# EAGLE board humidity-v2.4 panel (EAGLE 6.4)
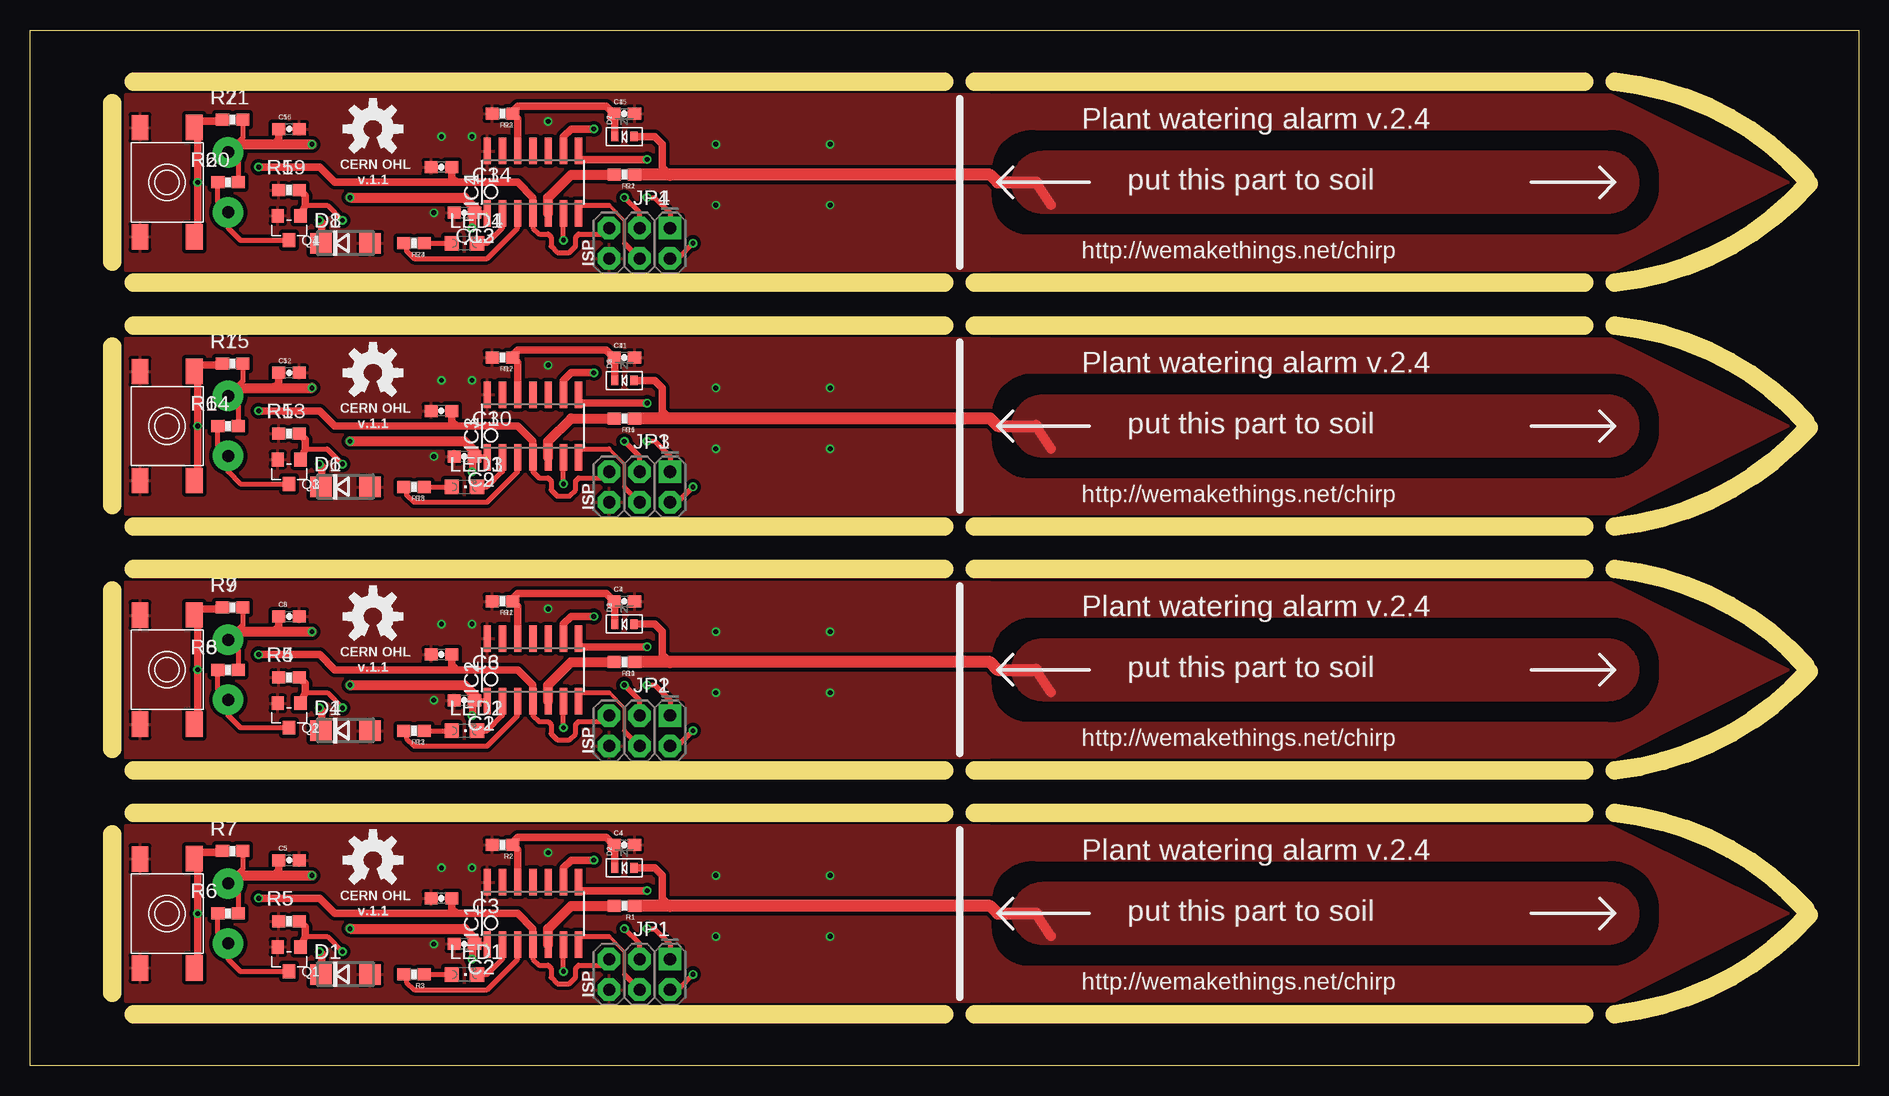
[diagram p0: board, top side]
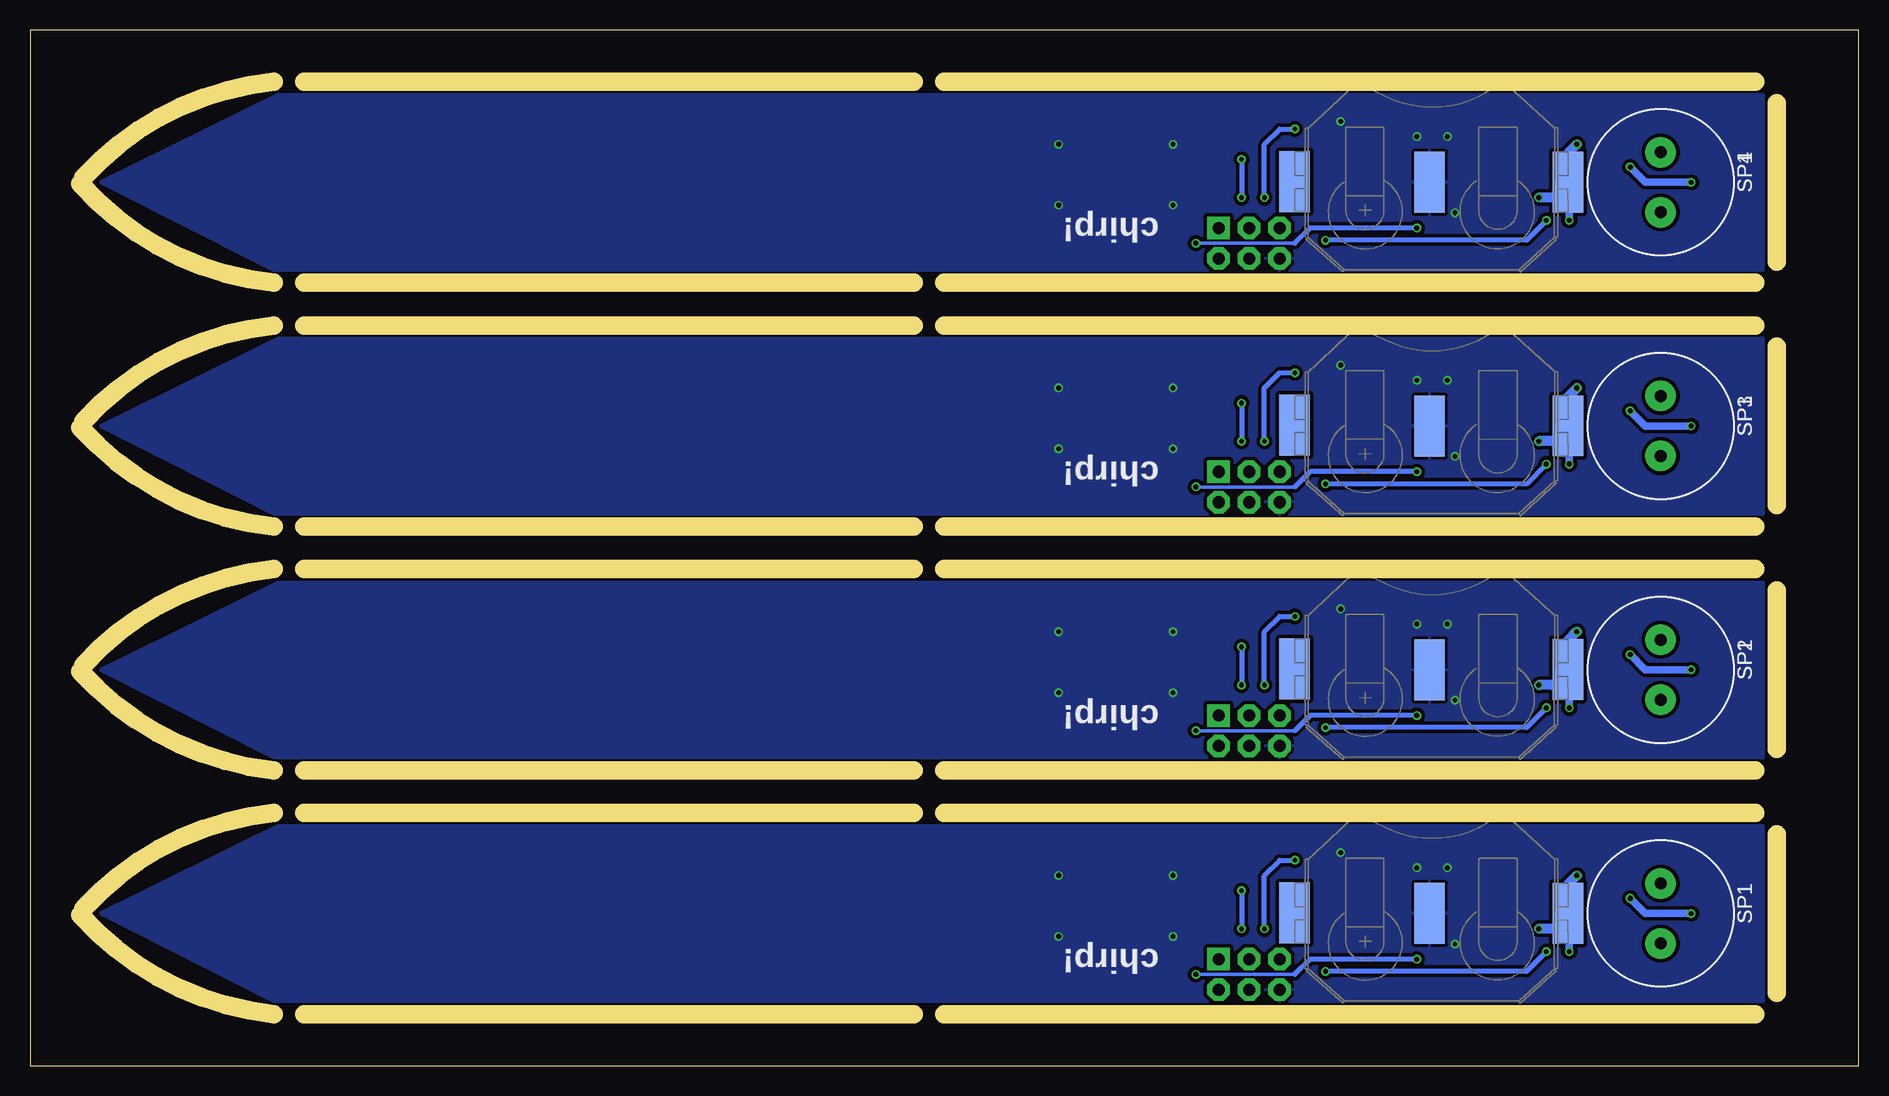
[diagram p1: board, bottom side, seen from below]

Size 152.4 x 86.36 mm. Coordinates in mm from the lower left corner, seen from the top.
Outline: 0,0 0,86.36 152.4,86.36 152.4,0 0,0
Copper layers (1*16): Top 0.035mm / dielectric 1.5mm / Bottom 0.035mm
Design rules "Fusion_eagle_rule_v1.1": minimum track width 6mil, minimum drill 12mil, track to track 6mil, track to pad 6mil, pad to pad 6mil, via to via 6mil, smd to smd 0mil, copper to edge 10mil, drill to drill 10mil, minimum pad ring 10mil, minimum via ring 6mil, stop-mask expansion 2mil, vias tented up to drill 100mil, thermal gap 10mil
Milling: 32 lines

## Footprints (pad centres in the part's own frame; a part is rotated, then mirrored left to right if it is on the bottom)
BAT-HLD-001 = smd 2.54 x 5.08: 1 -11.51,-0.02; 2 0,0; 3 11.25,-0.07
0603-CAP = smd 1.1 x 1: 1 -0.85,0; 2 0.85,0
DO214AC = smd 1.8 x 1.7: A 2.05,0; C -2.05,0
SOD-523 = smd 0.8 x 0.6: A 0,-0.8; K 0,0.8
SOIC14 = smd 0.61 x 2.21: 1 -3.81,-2.603; 2 -2.54,-2.603; 3 -1.27,-2.603; 4 0,-2.603; 5 1.27,-2.603; 6 2.54,-2.603; 7 3.81,-2.603; 8 3.81,2.603; 9 2.54,2.603; 10 1.27,2.603; 11 0,2.603; 12 -1.27,2.603; 13 -2.54,2.603; 14 -3.81,2.603
2X3-NS = drill 1.016 pad 1.88 square: 1 -2.54,-1.27 | drill 1.016 pad 1.88 octagon: 2 -2.54,1.27; 3 0,-1.27; 4 0,1.27; 5 2.54,-1.27; 6 2.54,1.27
CHIPLED_0805 = smd 1.2 x 1.2: A 0,-1.05; C 0,1.05
SOT23 = smd 1.016 x 1.143: 1 -0.95,-1.016; 2 0.95,-1.016; 3 0,1.016
0603-RES = smd 1.1 x 1: 1 -0.85,0; 2 0.85,0
PS12 = drill 1 pad 2.54: P$1 -2.5,0; P$2 2.5,0
FSMJSMA = smd 2.108 x 1.397: A -4.547,-2.261; A' 4.568,-2.261; B -4.547,2.261; B' 4.547,2.261

## Placement (x,y rotation side)
B1  [BAT-HLD-001]  35.76,12.7 180 bottom
B2  [BAT-HLD-001]  35.76,33.02 180 bottom
B3  [BAT-HLD-001]  35.76,53.34 180 bottom
B4  [BAT-HLD-001]  35.76,73.66 180 bottom
C1  100nF  [0603-CAP]  36.2,30.48 180 top
C2  100nF  [0603-CAP]  36.2,10.16 180 top
C3  100nF  [0603-CAP]  34.29,13.97 180 top
C4  1uF  [0603-CAP]  49.53,18.41 0 top
C5  1uF  [0603-CAP]  21.59,17.14 0 top
C6  100nF  [0603-CAP]  34.29,34.29 180 top
C7  1uF  [0603-CAP]  49.53,38.73 0 top
C8  1uF  [0603-CAP]  21.59,37.47 0 top
C9  100nF  [0603-CAP]  36.2,50.8 180 top
C10  100nF  [0603-CAP]  34.29,54.61 180 top
C11  1uF  [0603-CAP]  49.53,59.05 0 top
C12  1uF  [0603-CAP]  21.59,57.79 0 top
C13  100nF  [0603-CAP]  36.2,71.12 180 top
C14  100nF  [0603-CAP]  34.29,74.93 180 top
C15  1uF  [0603-CAP]  49.53,79.38 0 top
C16  1uF  [0603-CAP]  21.59,78.11 0 top
D1  [DO214AC]  26.29,7.62 0 top
D2  DIODE-SCHOTTKY_  [SOD-523]  49.53,16.51 90 top
D3  DIODE-SCHOTTKY_  [SOD-523]  49.53,36.83 90 top
D4  [DO214AC]  26.29,27.94 0 top
D5  DIODE-SCHOTTKY_  [SOD-523]  49.53,57.15 90 top
D6  [DO214AC]  26.29,48.26 0 top
D7  DIODE-SCHOTTKY_  [SOD-523]  49.53,77.47 90 top
D8  [DO214AC]  26.29,68.58 0 top
IC1  TINY24/44/84-SSU  [SOIC14]  41.91,12.7 0 top
IC2  TINY24/44/84-SSU  [SOIC14]  41.91,33.02 0 top
IC3  TINY24/44/84-SSU  [SOIC14]  41.91,53.34 0 top
IC4  TINY24/44/84-SSU  [SOIC14]  41.91,73.66 0 top
JP1  AVR_SPI_PRG_6NS  [2X3-NS]  50.8,7.62 180 top
JP2  AVR_SPI_PRG_6NS  [2X3-NS]  50.8,27.94 180 top
JP3  AVR_SPI_PRG_6NS  [2X3-NS]  50.8,48.26 180 top
JP4  AVR_SPI_PRG_6NS  [2X3-NS]  50.8,68.58 180 top
LED1  [CHIPLED_0805]  36.2,7.62 270 top
LED2  [CHIPLED_0805]  36.2,27.94 270 top
LED3  [CHIPLED_0805]  36.2,48.26 270 top
LED4  [CHIPLED_0805]  36.2,68.58 270 top
Q1  [SOT23]  21.59,8.89 180 top
Q2  [SOT23]  21.59,29.21 180 top
Q3  [SOT23]  21.59,49.53 180 top
Q4  [SOT23]  21.59,69.85 180 top
R1  10K  [0603-RES]  49.53,13.34 180 top
R2  510K  [0603-RES]  39.37,18.41 180 top
R3  100R  [0603-RES]  32,7.62 180 top
R4  10K  [0603-RES]  21.59,32.38 0 top
R5  10K  [0603-RES]  21.59,12.07 0 top
R6  1K  [0603-RES]  16.51,12.7 0 top
R7  10K  [0603-RES]  16.89,17.91 0 top
R8  1K  [0603-RES]  16.51,33.02 0 top
R9  10K  [0603-RES]  16.89,38.23 0 top
R10  10K  [0603-RES]  49.53,33.66 180 top
R11  510K  [0603-RES]  39.37,38.73 180 top
R12  100R  [0603-RES]  32,27.94 180 top
R13  10K  [0603-RES]  21.59,52.71 0 top
R14  1K  [0603-RES]  16.51,53.34 0 top
R15  10K  [0603-RES]  16.89,58.55 0 top
R16  10K  [0603-RES]  49.53,53.98 180 top
R17  510K  [0603-RES]  39.37,59.05 180 top
R18  100R  [0603-RES]  32,48.26 180 top
R19  10K  [0603-RES]  21.59,73.03 0 top
R20  1K  [0603-RES]  16.51,73.66 0 top
R21  10K  [0603-RES]  16.89,78.87 0 top
R22  10K  [0603-RES]  49.53,74.3 180 top
R23  510K  [0603-RES]  39.37,79.38 180 top
R24  100R  [0603-RES]  32,68.58 180 top
SP1  SPEAKER/PS12  [PS12]  16.51,12.7 270 bottom
SP2  SPEAKER/PS12  [PS12]  16.51,33.02 270 bottom
SP3  SPEAKER/PS12  [PS12]  16.51,53.34 270 bottom
SP4  SPEAKER/PS12  [PS12]  16.51,73.66 270 bottom
SW1  SPST_TACTFSMJSMA  [FSMJSMA]  11.43,12.7 90 top
SW2  SPST_TACTFSMJSMA  [FSMJSMA]  11.43,33.02 90 top
SW3  SPST_TACTFSMJSMA  [FSMJSMA]  11.43,53.34 90 top
SW4  SPST_TACTFSMJSMA  [FSMJSMA]  11.43,73.66 90 top

## Library data of the parts
B1-B4 C1-C16 JP1-JP4 R1-R24 = SparkFun
D1 D4 D6 D8 = diode
D2 D3 D5 D7 = microbuilder
IC1-IC4 = avr-5
LED1-LED4 SP1-SP4 SW1-SW4 = adafruit
Q1-Q4 = Seeed-Discrete

## Nets
BUZZER: IC1.6 Q1.1 R5.2
BUZZER1: IC2.6 Q2.1 R4.2
BUZZER2: IC3.6 Q3.1 R13.2
BUZZER3: IC4.6 Q4.1 R19.2
CAPACITANCE_V: C4.1 D2.K IC1.12 R2.1
CAPACITANCE_V1: C7.1 D3.K IC2.12 R11.1
CAPACITANCE_V2: C11.1 D5.K IC3.12 R17.1
CAPACITANCE_V3: C15.1 D7.K IC4.12 R23.1
CLK_OUT: IC1.5 R1.2
CLK_OUT1: IC2.5 R10.2
CLK_OUT2: IC3.5 R16.2
CLK_OUT3: IC4.5 R22.2
GND: B1.2 C2.2 C3.2 C4.2 C5.2 D1.A IC1.14 JP1.6 Q1.2 R2.2 R5.1 SW1.B SW1.B'
GND1: B2.2 C1.2 C6.2 C7.2 C8.2 D4.A IC2.14 JP2.6 Q2.2 R4.1 R11.2 SW2.B SW2.B'
GND2: B3.2 C9.2 C10.2 C11.2 C12.2 D6.A IC3.14 JP3.6 Q3.2 R13.1 R17.2 SW3.B SW3.B'
GND3: B4.2 C13.2 C14.2 C15.2 C16.2 D8.A IC4.14 JP4.6 Q4.2 R19.1 R23.2 SW4.B SW4.B'
LED_A: IC1.3 R3.2
LED_A1: IC2.3 R12.2
LED_A2: IC3.3 R18.2
LED_A3: IC4.3 R24.2
LED_K: IC1.2 LED1.C
LED_K1: IC2.2 LED2.C
LED_K2: IC3.2 LED3.C
LED_K3: IC4.2 LED4.C
MISO: IC1.8 JP1.1
MISO1: IC2.8 JP2.1
MISO2: IC3.8 JP3.1
MISO3: IC4.8 JP4.1
MOSI: IC1.7 JP1.4
MOSI1: IC2.7 JP2.4
MOSI2: IC3.7 JP3.4
MOSI3: IC4.7 JP4.4
N$1: Q1.3 R6.1 SP1.P$2
N$2: LED1.A R3.1
N$4: Q2.3 R8.1 SP2.P$2
N$5: LED2.A R12.1
N$6: Q3.3 R14.1 SP3.P$2
N$7: LED3.A R18.1
N$8: Q4.3 R20.1 SP4.P$2
N$9: LED4.A R24.1
RESET: C3.1 IC1.4 JP1.5 R7.1 SW1.A SW1.A'
RESET1: C6.1 IC2.4 JP2.5 R9.1 SW2.A SW2.A'
RESET2: C10.1 IC3.4 JP3.5 R15.1 SW3.A SW3.A'
RESET3: C14.1 IC4.4 JP4.5 R21.1 SW4.A SW4.A'
SCK: IC1.9 JP1.3
SCK1: IC2.9 JP2.3
SCK2: IC3.9 JP3.3
SCK3: IC4.9 JP4.3
V_CAP: D2.A R1.1
V_CAP1: D3.A R10.1
V_CAP2: D5.A R16.1
V_CAP3: D7.A R22.1
VCC: B1.1 C2.1 C5.1 D1.C IC1.1 JP1.2 R6.2 R7.2 SP1.P$1
VCC1: B2.1 C1.1 C8.1 D4.C IC2.1 JP2.2 R8.2 R9.2 SP2.P$1
VCC2: B3.1 C9.1 C12.1 D6.C IC3.1 JP3.2 R14.2 R15.2 SP3.P$1
VCC3: B4.1 C13.1 C16.1 D8.C IC4.1 JP4.2 R20.2 R21.2 SP4.P$1

## Tracks (layer width: path | path; a pad name or v marks a point on that pad's centre or on a via)
BUZZER  (via drill 0.4 pad 0.3)
  Top 0.406: v44.45,7.87 IC1.6 | v26.04,9.53 24.77,10.79 22.93,10.79
  Top 0.61: Q1.1 22.93,10.79 22.93,11.58 R5.2
  Bottom 0.406: v44.45,7.87 27.69,7.87 v26.04,9.53
BUZZER1  (via drill 0.4 pad 0.3)
  Top 0.406: v44.45,28.19 IC2.6 | v26.04,29.84 24.77,31.11 22.93,31.11
  Top 0.61: Q2.1 22.93,31.11 22.93,31.9 R4.2
  Bottom 0.406: v44.45,28.19 27.69,28.19 v26.04,29.84
BUZZER2  (via drill 0.4 pad 0.3)
  Top 0.406: v44.45,48.51 IC3.6 | v26.04,50.16 24.77,51.44 22.93,51.44
  Top 0.61: Q3.1 22.93,51.44 22.93,52.22 R13.2
  Bottom 0.406: v44.45,48.51 27.69,48.51 v26.04,50.16
BUZZER3  (via drill 0.4 pad 0.3)
  Top 0.406: v44.45,68.83 IC4.6 | v26.04,70.48 24.77,71.75 22.93,71.75
  Top 0.61: Q4.1 22.93,71.75 22.93,72.54 R19.2
  Bottom 0.406: v44.45,68.83 27.69,68.83 v26.04,70.48
CAPACITANCE_V
  Top 0.406: 40.64,18 R2.1 40.22,18.63
  Top 0.61: 40.64,18 IC1.12 | 40.22,18.63 40.64,19.05 48.02,19.05 C4.1 48.73,18.36 D2.K
CAPACITANCE_V1
  Top 0.406: 40.64,38.32 R11.1 40.22,38.95
  Top 0.61: 40.64,38.32 IC2.12 | 40.22,38.95 40.64,39.37 48.02,39.37 C7.1 48.73,38.69 D3.K
CAPACITANCE_V2
  Top 0.406: 40.64,58.64 R17.1 40.22,59.27
  Top 0.61: 40.64,58.64 IC3.12 | 40.22,59.27 40.64,59.69 48.02,59.69 C11.1 48.73,59.01 D5.K
CAPACITANCE_V3
  Top 0.406: 40.64,78.95 R23.1 40.22,79.59
  Top 0.61: 40.64,78.95 IC4.12 | 40.22,79.59 40.64,80.01 48.02,80.01 C15.1 48.73,79.33 D7.K
CLK_OUT
  Top 0.813: IC1.5 43.18,11.43 45.09,13.34 R1.2
CLK_OUT1
  Top 0.813: IC2.5 43.18,31.75 45.09,33.66 R10.2
CLK_OUT2
  Top 0.813: IC3.5 43.18,52.07 45.09,53.98 R16.2
CLK_OUT3
  Top 0.813: IC4.5 43.18,72.39 45.09,74.3 R22.2
GND  (via drill 0.4, 0.4 pad 0.3)
  other vias: 34.29,16.51 36.83,16.51 33.66,10.16 43.18,17.78 66.68,15.88 66.68,10.79 57.15,15.88 57.15,10.79
  pour Top (isolate 0.305): 7.92,19.99 7.92,5.38 80.01,5.38 80.01,19.99
  pour Bottom (isolate 0.305): 7.92,19.99 131.75,19.99 146.56,12.7 132.08,5.38 7.92,5.38
  pour Top (isolate 0.305, no thermals): 80.01,19.99 131.75,19.99 146.56,12.7 132.08,5.38 80.01,5.38 80.01,11.43 arc90 83.19,8.26 131.44,8.26 arc90 135.89,12.07 135.89,13.34 arc90 131.44,17.14 83.82,17.14 arc90 80.01,13.97
GND1  (via drill 0.4, 0.4 pad 0.3)
  other vias: 34.29,36.83 36.83,36.83 33.66,30.48 43.18,38.1 66.68,36.2 66.68,31.11 57.15,36.2 57.15,31.11
  pour Top (isolate 0.305): 7.92,40.31 7.92,25.7 80.01,25.7 80.01,40.31
  pour Bottom (isolate 0.305): 7.92,40.31 131.75,40.31 146.56,33.02 132.08,25.7 7.92,25.7
  pour Top (isolate 0.305, no thermals): 80.01,40.31 131.75,40.31 146.56,33.02 132.08,25.7 80.01,25.7 80.01,31.75 arc90 83.19,28.57 131.44,28.57 arc90 135.89,32.38 135.89,33.66 arc90 131.44,37.47 83.82,37.47 arc90 80.01,34.29
GND2  (via drill 0.4, 0.4 pad 0.3)
  other vias: 34.29,57.15 36.83,57.15 33.66,50.8 43.18,58.42 66.68,56.52 66.68,51.44 57.15,56.52 57.15,51.44
  pour Top (isolate 0.305): 7.92,60.63 7.92,46.02 80.01,46.02 80.01,60.63
  pour Bottom (isolate 0.305): 7.92,60.63 131.75,60.63 146.56,53.34 132.08,46.02 7.92,46.02
  pour Top (isolate 0.305, no thermals): 80.01,60.63 131.75,60.63 146.56,53.34 132.08,46.02 80.01,46.02 80.01,52.07 arc90 83.19,48.9 131.44,48.9 arc90 135.89,52.71 135.89,53.98 arc90 131.44,57.79 83.82,57.79 arc90 80.01,54.61
GND3  (via drill 0.4, 0.4 pad 0.3)
  other vias: 34.29,77.47 36.83,77.47 33.66,71.12 43.18,78.74 66.68,76.84 66.68,71.75 57.15,76.84 57.15,71.75
  pour Top (isolate 0.305): 7.92,80.95 7.92,66.34 80.01,66.34 80.01,80.95
  pour Bottom (isolate 0.305): 7.92,80.95 131.75,80.95 146.56,73.66 132.08,66.34 7.92,66.34
  pour Top (isolate 0.305, no thermals): 80.01,80.95 131.75,80.95 146.56,73.66 132.08,66.34 80.01,66.34 80.01,72.39 arc90 83.19,69.22 131.44,69.22 arc90 135.89,73.03 135.89,74.3 arc90 131.44,78.11 83.82,78.11 arc90 80.01,74.93
LED_A
  Top 0.406: IC1.3 40.64,8.89 38.1,6.35 32,6.35 31.37,6.98 31.37,7.41 R3.2
LED_A1
  Top 0.406: IC2.3 40.64,29.21 38.1,26.67 32,26.67 31.37,27.3 31.37,27.72 R12.2
LED_A2
  Top 0.406: IC3.3 40.64,49.53 38.1,46.99 32,46.99 31.37,47.62 31.37,48.05 R18.2
LED_A3
  Top 0.406: IC4.3 40.64,69.85 38.1,67.31 32,67.31 31.37,67.95 31.37,68.37 R24.2
LED_K
  Top 0.406: IC1.2 39.37,8.89 38.1,7.62 LED1.C
LED_K1
  Top 0.406: IC2.2 39.37,29.21 38.1,27.94 LED2.C
LED_K2
  Top 0.406: IC3.2 39.37,49.53 38.1,48.26 LED3.C
LED_K3
  Top 0.406: IC4.2 39.37,69.85 38.1,68.58 LED4.C
MISO  (via drill 0.4 pad 0.3)
  Top 0.406: JP1.1 53.34,10.16 52.07,11.43 v51.44,11.43 | IC1.8 45.78,15.24
  Top 0.61: v51.44,14.61 45.72,14.61 IC1.8
  Bottom 0.406: v51.44,14.61 v51.44,11.43
MISO1  (via drill 0.4 pad 0.3)
  Top 0.406: JP2.1 53.34,30.48 52.07,31.75 v51.44,31.75 | IC2.8 45.78,35.56
  Top 0.61: v51.44,34.92 45.72,34.92 IC2.8
  Bottom 0.406: v51.44,34.92 v51.44,31.75
MISO2  (via drill 0.4 pad 0.3)
  Top 0.406: JP3.1 53.34,50.8 52.07,52.07 v51.44,52.07 | IC3.8 45.78,55.88
  Top 0.61: v51.44,55.25 45.72,55.25 IC3.8
  Bottom 0.406: v51.44,55.25 v51.44,52.07
MISO3  (via drill 0.4 pad 0.3)
  Top 0.406: JP4.1 53.34,71.12 52.07,72.39 v51.44,72.39 | IC4.8 45.78,76.2
  Top 0.61: v51.44,75.56 45.72,75.56 IC4.8
  Bottom 0.406: v51.44,75.56 v51.44,72.39
MOSI
  Top 0.305: 49.53,7.62 49.53,9.53 48.26,10.79
  Top 0.406: 49.53,7.62 JP1.4 | 48.26,10.79 45.78,10.79 IC1.7
MOSI1
  Top 0.305: 49.53,27.94 49.53,29.84 48.26,31.11
  Top 0.406: 49.53,27.94 JP2.4 | 48.26,31.11 45.78,31.11 IC2.7
MOSI2
  Top 0.305: 49.53,48.26 49.53,50.16 48.26,51.44
  Top 0.406: 49.53,48.26 JP3.4 | 48.26,51.44 45.78,51.44 IC3.7
MOSI3
  Top 0.305: 49.53,68.58 49.53,70.48 48.26,71.75
  Top 0.406: 49.53,68.58 JP4.4 | 48.26,71.75 45.78,71.75 IC4.7
N$1
  Top 0.406: Q1.3 17.53,7.87 16.51,8.89 SP1.P$2 15.66,11.05 R6.1
N$2
  Top 0.406: R3.1 LED1.A
N$4
  Top 0.406: Q2.3 17.53,28.19 16.51,29.21 SP2.P$2 15.66,31.37 R8.1
N$5
  Top 0.406: R12.1 LED2.A
N$6
  Top 0.406: Q3.3 17.53,48.51 16.51,49.53 SP3.P$2 15.66,51.69 R14.1
N$7
  Top 0.406: R18.1 LED3.A
N$8
  Top 0.406: Q4.3 17.53,68.83 16.51,69.85 SP4.P$2 15.66,72.01 R20.1
N$9
  Top 0.406: R24.1 LED4.A
RESET  (via drill 0.4 pad 0.3)
  Top 0.406: R7.1 15.65,17.91 | IC1.4 41.91,8.89 42.42,8.38 43.18,8.38 43.43,8.13 43.43,7.37 43.94,6.86 44.96,6.86 45.47,7.37 45.47,8.13 45.72,8.38 47.75,8.38 JP1.5
  Top 0.61: v19.05,13.97 24.13,13.97 25.4,12.7 35.56,12.7 | 35.56,12.7 40.64,12.7 41.91,11.43 IC1.4 | C3.1 35.16,13.1 35.56,12.7 | SW1.A 13.97,8.43 v13.97,12.7 13.97,16.99 SW1.A' 13.69,17.75 13.72,17.78 15.52,17.78 15.65,17.91
  Bottom 0.61: v19.05,13.97 17.78,12.7 v13.97,12.7
RESET1  (via drill 0.4 pad 0.3)
  Top 0.406: R9.1 15.65,38.23 | IC2.4 41.91,29.21 42.42,28.7 43.18,28.7 43.43,28.45 43.43,27.69 43.94,27.18 44.96,27.18 45.47,27.69 45.47,28.45 45.72,28.7 47.75,28.7 JP2.5
  Top 0.61: v19.05,34.29 24.13,34.29 25.4,33.02 35.56,33.02 | 35.56,33.02 40.64,33.02 41.91,31.75 IC2.4 | C6.1 35.16,33.41 35.56,33.02 | SW2.A 13.97,28.75 v13.97,33.02 13.97,37.31 SW2.A' 13.69,38.08 13.72,38.1 15.52,38.1 15.65,38.23
  Bottom 0.61: v19.05,34.29 17.78,33.02 v13.97,33.02
RESET2  (via drill 0.4 pad 0.3)
  Top 0.406: R15.1 15.65,58.55 | IC3.4 41.91,49.53 42.42,49.02 43.18,49.02 43.43,48.77 43.43,48.01 43.94,47.5 44.96,47.5 45.47,48.01 45.47,48.77 45.72,49.02 47.75,49.02 JP3.5
  Top 0.61: v19.05,54.61 24.13,54.61 25.4,53.34 35.56,53.34 | 35.56,53.34 40.64,53.34 41.91,52.07 IC3.4 | C10.1 35.16,53.73 35.56,53.34 | SW3.A 13.97,49.07 v13.97,53.34 13.97,57.63 SW3.A' 13.69,58.4 13.72,58.42 15.52,58.42 15.65,58.55
  Bottom 0.61: v19.05,54.61 17.78,53.34 v13.97,53.34
RESET3  (via drill 0.4 pad 0.3)
  Top 0.406: R21.1 15.65,78.87 | IC4.4 41.91,69.85 42.42,69.34 43.18,69.34 43.43,69.09 43.43,68.33 43.94,67.82 44.96,67.82 45.47,68.33 45.47,69.09 45.72,69.34 47.75,69.34 JP4.5
  Top 0.61: v19.05,74.93 24.13,74.93 25.4,73.66 35.56,73.66 | 35.56,73.66 40.64,73.66 41.91,72.39 IC4.4 | C14.1 35.16,74.06 35.56,73.66 | SW4.A 13.97,69.39 v13.97,73.66 13.97,77.95 SW4.A' 13.69,78.72 13.72,78.74 15.52,78.74 15.65,78.87
  Bottom 0.61: v19.05,74.93 17.78,73.66 v13.97,73.66
SCK  (via drill 0.4 pad 0.3)
  Top 0.406: JP1.3 50.8,10.16 v49.53,11.43
  Top 0.61: v46.99,17.14 45.09,17.14 44.45,16.51 IC1.9
  Bottom 0.406: v49.53,11.43 49.53,15.88 48.26,17.14 v46.99,17.14
SCK1  (via drill 0.4 pad 0.3)
  Top 0.406: JP2.3 50.8,30.48 v49.53,31.75
  Top 0.61: v46.99,37.47 45.09,37.47 44.45,36.83 IC2.9
  Bottom 0.406: v49.53,31.75 49.53,36.2 48.26,37.47 v46.99,37.47
SCK2  (via drill 0.4 pad 0.3)
  Top 0.406: JP3.3 50.8,50.8 v49.53,52.07
  Top 0.61: v46.99,57.79 45.09,57.79 44.45,57.15 IC3.9
  Bottom 0.406: v49.53,52.07 49.53,56.52 48.26,57.79 v46.99,57.79
SCK3  (via drill 0.4 pad 0.3)
  Top 0.406: JP4.3 50.8,71.12 v49.53,72.39
  Top 0.61: v46.99,78.11 45.09,78.11 44.45,77.47 IC4.9
  Bottom 0.406: v49.53,72.39 49.53,76.84 48.26,78.11 v46.99,78.11
V_CAP
  Top 0.61: D2.A 52.07,16.51 52.7,15.88 52.7,13.97 53.34,13.34
  Top 0.813: 83.82,12.7 85.07,10.82
  Top 1.016: 83.82,12.7 80.65,12.7 80.01,13.34 53.34,13.34 R1.1
  pour Top (no thermals): 81.92,12.7 arc-90 84.46,15.24 131.44,15.24 arc-90 133.98,12.7 arc-90 131.44,10.16 84.46,10.16 arc-90
V_CAP1
  Top 0.61: D3.A 52.07,36.83 52.7,36.2 52.7,34.29 53.34,33.66
  Top 0.813: 83.82,33.02 85.07,31.14
  Top 1.016: 83.82,33.02 80.65,33.02 80.01,33.66 53.34,33.66 R10.1
  pour Top (no thermals): 81.92,33.02 arc-90 84.46,35.56 131.44,35.56 arc-90 133.98,33.02 arc-90 131.44,30.48 84.46,30.48 arc-90
V_CAP2
  Top 0.61: D5.A 52.07,57.15 52.7,56.52 52.7,54.61 53.34,53.98
  Top 0.813: 83.82,53.34 85.07,51.46
  Top 1.016: 83.82,53.34 80.65,53.34 80.01,53.98 53.34,53.98 R16.1
  pour Top (no thermals): 81.92,53.34 arc-90 84.46,55.88 131.44,55.88 arc-90 133.98,53.34 arc-90 131.44,50.8 84.46,50.8 arc-90
V_CAP3
  Top 0.61: D7.A 52.07,77.47 52.7,76.84 52.7,74.93 53.34,74.3
  Top 0.813: 83.82,73.66 85.07,71.78
  Top 1.016: 83.82,73.66 80.65,73.66 80.01,74.3 53.34,74.3 R22.1
  pour Top (no thermals): 81.92,73.66 arc-90 84.46,76.2 131.44,76.2 arc-90 133.98,73.66 arc-90 131.44,71.12 84.46,71.12 arc-90
VCC  (via drill 0.4 pad 0.3)  (1 unrouted)
  Top 0.406: JP1.2 53.98,6.35 v55.24,7.62 | 36.89,8.89 v36.83,8.89 | C2.1 38.04,10.16 | R6.2 17.36,14.35 SP1.P$1 | R7.2 17.74,16.43 17.04,15.73
  Top 0.61: 36.89,8.89 36.89,10.01 C2.1 | C5.1 20.74,16.29 20.32,15.88 | SP1.P$1 17.23,15.75 | D1.C 24.34,9.32 v24.13,9.53
  Top 0.813: v23.49,15.88 20.32,15.88 17.18,15.88 17.04,15.73 SP1.P$1 | C2.1 37.07,10.55 36.2,11.43 v26.67,11.43
  Bottom 0.305: 46.99,7.62 v55.24,7.62
  Bottom 0.406: 46.99,7.62 45.72,8.89 v36.83,8.89 | B1.1 25.54,11.43
  Bottom 0.61: 24.25,15.12 B1.1 24.13,12.6 v24.13,9.53
  Bottom 0.813: v23.49,15.88 24.25,15.12 | 25.54,11.43 v26.67,11.43
VCC1  (via drill 0.4 pad 0.3)  (1 unrouted)
  Top 0.406: JP2.2 53.98,26.67 v55.24,27.94 | 36.89,29.21 v36.83,29.21 | C1.1 38.04,30.48 | R8.2 17.36,34.67 SP2.P$1 | R9.2 17.74,36.75 17.04,36.05
  Top 0.61: 36.89,29.21 36.89,30.33 C1.1 | C8.1 20.74,36.62 20.32,36.2 | SP2.P$1 17.23,36.07 | D4.C 24.34,29.64 v24.13,29.84
  Top 0.813: v23.49,36.2 20.32,36.2 17.18,36.2 17.04,36.05 SP2.P$1 | C1.1 37.07,30.88 36.2,31.75 v26.67,31.75
  Bottom 0.305: 46.99,27.94 v55.24,27.94
  Bottom 0.406: 46.99,27.94 45.72,29.21 v36.83,29.21 | B2.1 25.54,31.75
  Bottom 0.61: 24.25,35.44 B2.1 24.13,32.92 v24.13,29.84
  Bottom 0.813: v23.49,36.2 24.25,35.44 | 25.54,31.75 v26.67,31.75
VCC2  (via drill 0.4 pad 0.3)  (1 unrouted)
  Top 0.406: JP3.2 53.98,46.99 v55.24,48.26 | 36.89,49.53 v36.83,49.53 | C9.1 38.04,50.8 | R14.2 17.36,54.99 SP3.P$1 | R15.2 17.74,57.07 17.04,56.37
  Top 0.61: 36.89,49.53 36.89,50.65 C9.1 | C12.1 20.74,56.94 20.32,56.52 | SP3.P$1 17.23,56.39 | D6.C 24.34,49.96 v24.13,50.16
  Top 0.813: v23.49,56.52 20.32,56.52 17.18,56.52 17.04,56.37 SP3.P$1 | C9.1 37.07,51.2 36.2,52.07 v26.67,52.07
  Bottom 0.305: 46.99,48.26 v55.24,48.26
  Bottom 0.406: 46.99,48.26 45.72,49.53 v36.83,49.53 | B3.1 25.54,52.07
  Bottom 0.61: 24.25,55.76 B3.1 24.13,53.24 v24.13,50.16
  Bottom 0.813: v23.49,56.52 24.25,55.76 | 25.54,52.07 v26.67,52.07
VCC3  (via drill 0.4 pad 0.3)  (1 unrouted)
  Top 0.406: JP4.2 53.98,67.31 v55.24,68.58 | 36.89,69.85 v36.83,69.85 | C13.1 38.04,71.12 | R20.2 17.36,75.31 SP4.P$1 | R21.2 17.74,77.39 17.04,76.69
  Top 0.61: 36.89,69.85 36.89,70.97 C13.1 | C16.1 20.74,77.25 20.32,76.84 | SP4.P$1 17.23,76.71 | D8.C 24.34,70.28 v24.13,70.48
  Top 0.813: v23.49,76.84 20.32,76.84 17.18,76.84 17.04,76.69 SP4.P$1 | C13.1 37.07,71.52 36.2,72.39 v26.67,72.39
  Bottom 0.305: 46.99,68.58 v55.24,68.58
  Bottom 0.406: 46.99,68.58 45.72,69.85 v36.83,69.85 | B4.1 25.54,72.39
  Bottom 0.61: 24.25,76.08 B4.1 24.13,73.56 v24.13,70.48
  Bottom 0.813: v23.49,76.84 24.25,76.08 | 25.54,72.39 v26.67,72.39

## Text on the board
_tsilk: Plant watering alarm v.2.4 | CERN OHL | v.1.1 | put this part to soil | http://wemakethings.net/chirp | ISP | Plant watering alarm v.2.4 | CERN OHL | v.1.1 | put this part to soil | ISP | http://wemakethings.net/chirp | Plant watering alarm v.2.4 | CERN OHL | v.1.1 | put this part to soil | http://wemakethings.net/chirp | ISP | Plant watering alarm v.2.4 | CERN OHL | v.1.1 | put this part to soil | http://wemakethings.net/chirp | ISP
_bsilk: chirp! | chirp! | chirp! | chirp!
_tNames: R7 | C4 | C5 | R2 | D2 | R6 | R5 | C3 | R1 | JP1 | IC1 | D1 | LED1 | C2 | Q1 | R3 | R7 | C4 | C5 | R2 | D2 | R6 | R5 | C3 | R1 | JP1 | IC1 | D1 | LED1 | C2 | Q1 | R3 | R7 | C4 | C5 | R2 | D2 | R6 | R5 | C3 | R1 | JP1 | IC1 | D1 | Q1 | LED1 | C2 | R3 | R7 | C4 | C5 | R2 | D2 | R6 | R5 | C3 | R1 | JP1 | IC1 | D1 | LED1 | C2 | Q1 | R3
_bNames: SP1 | SP1 | SP1 | SP1
_tFinish: Q1 | Q1 | Q1 | Q1